# Altium PCB powerSupply.PcbDoc
Units mm, origin at the board's own origin, x right, y up, seen from the top; angles counter-clockwise.
Board outline 52 x 53 mm, 2 copper layers (Top Layer, Bottom Layer); 33 components, 25 nets, 89 pads, 40 vias.
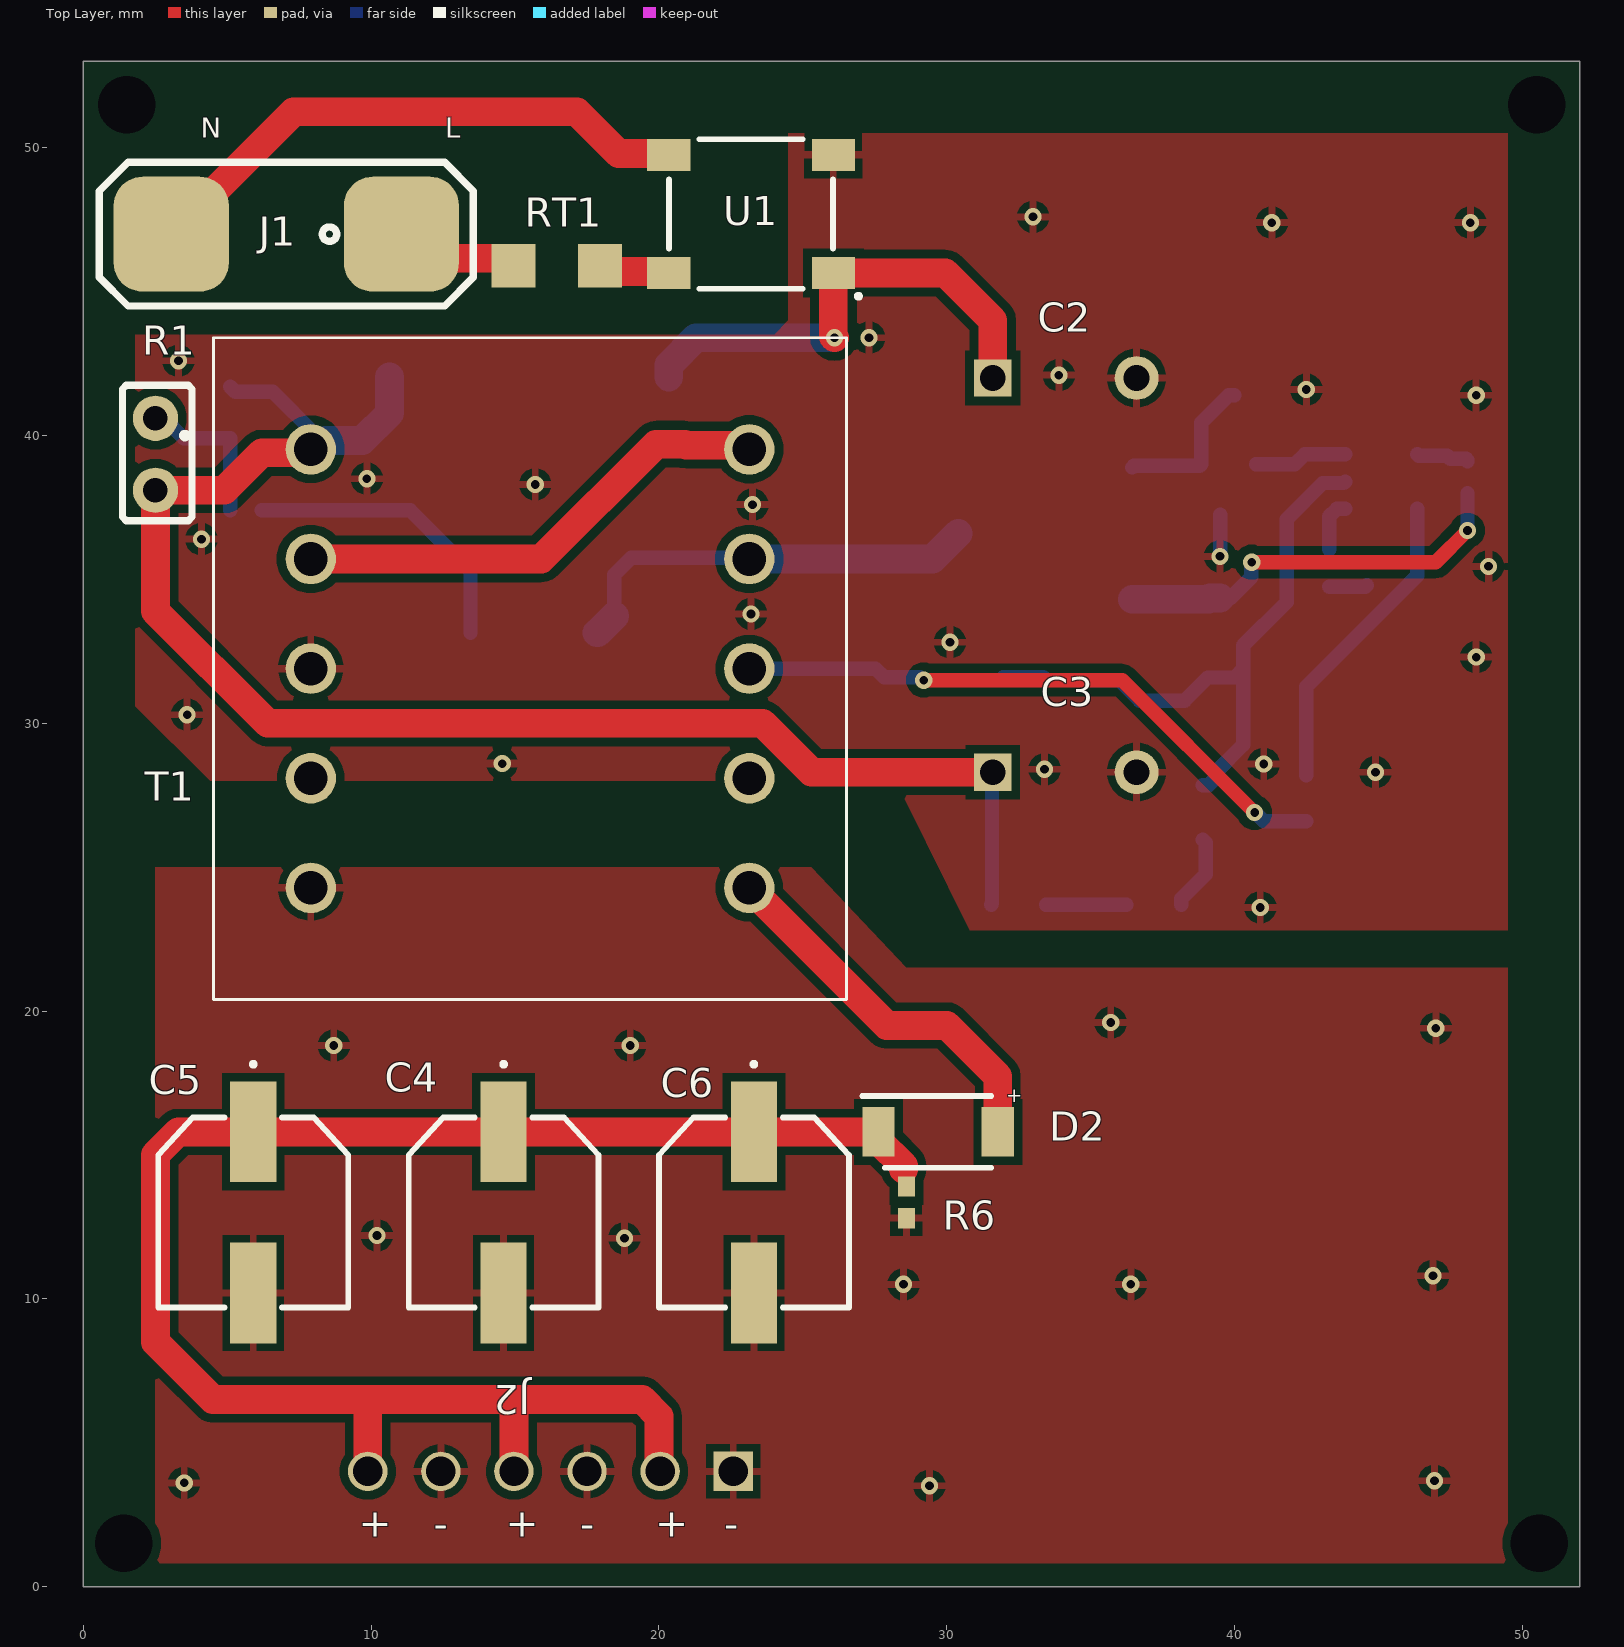
[diagram p0: Top Layer view]
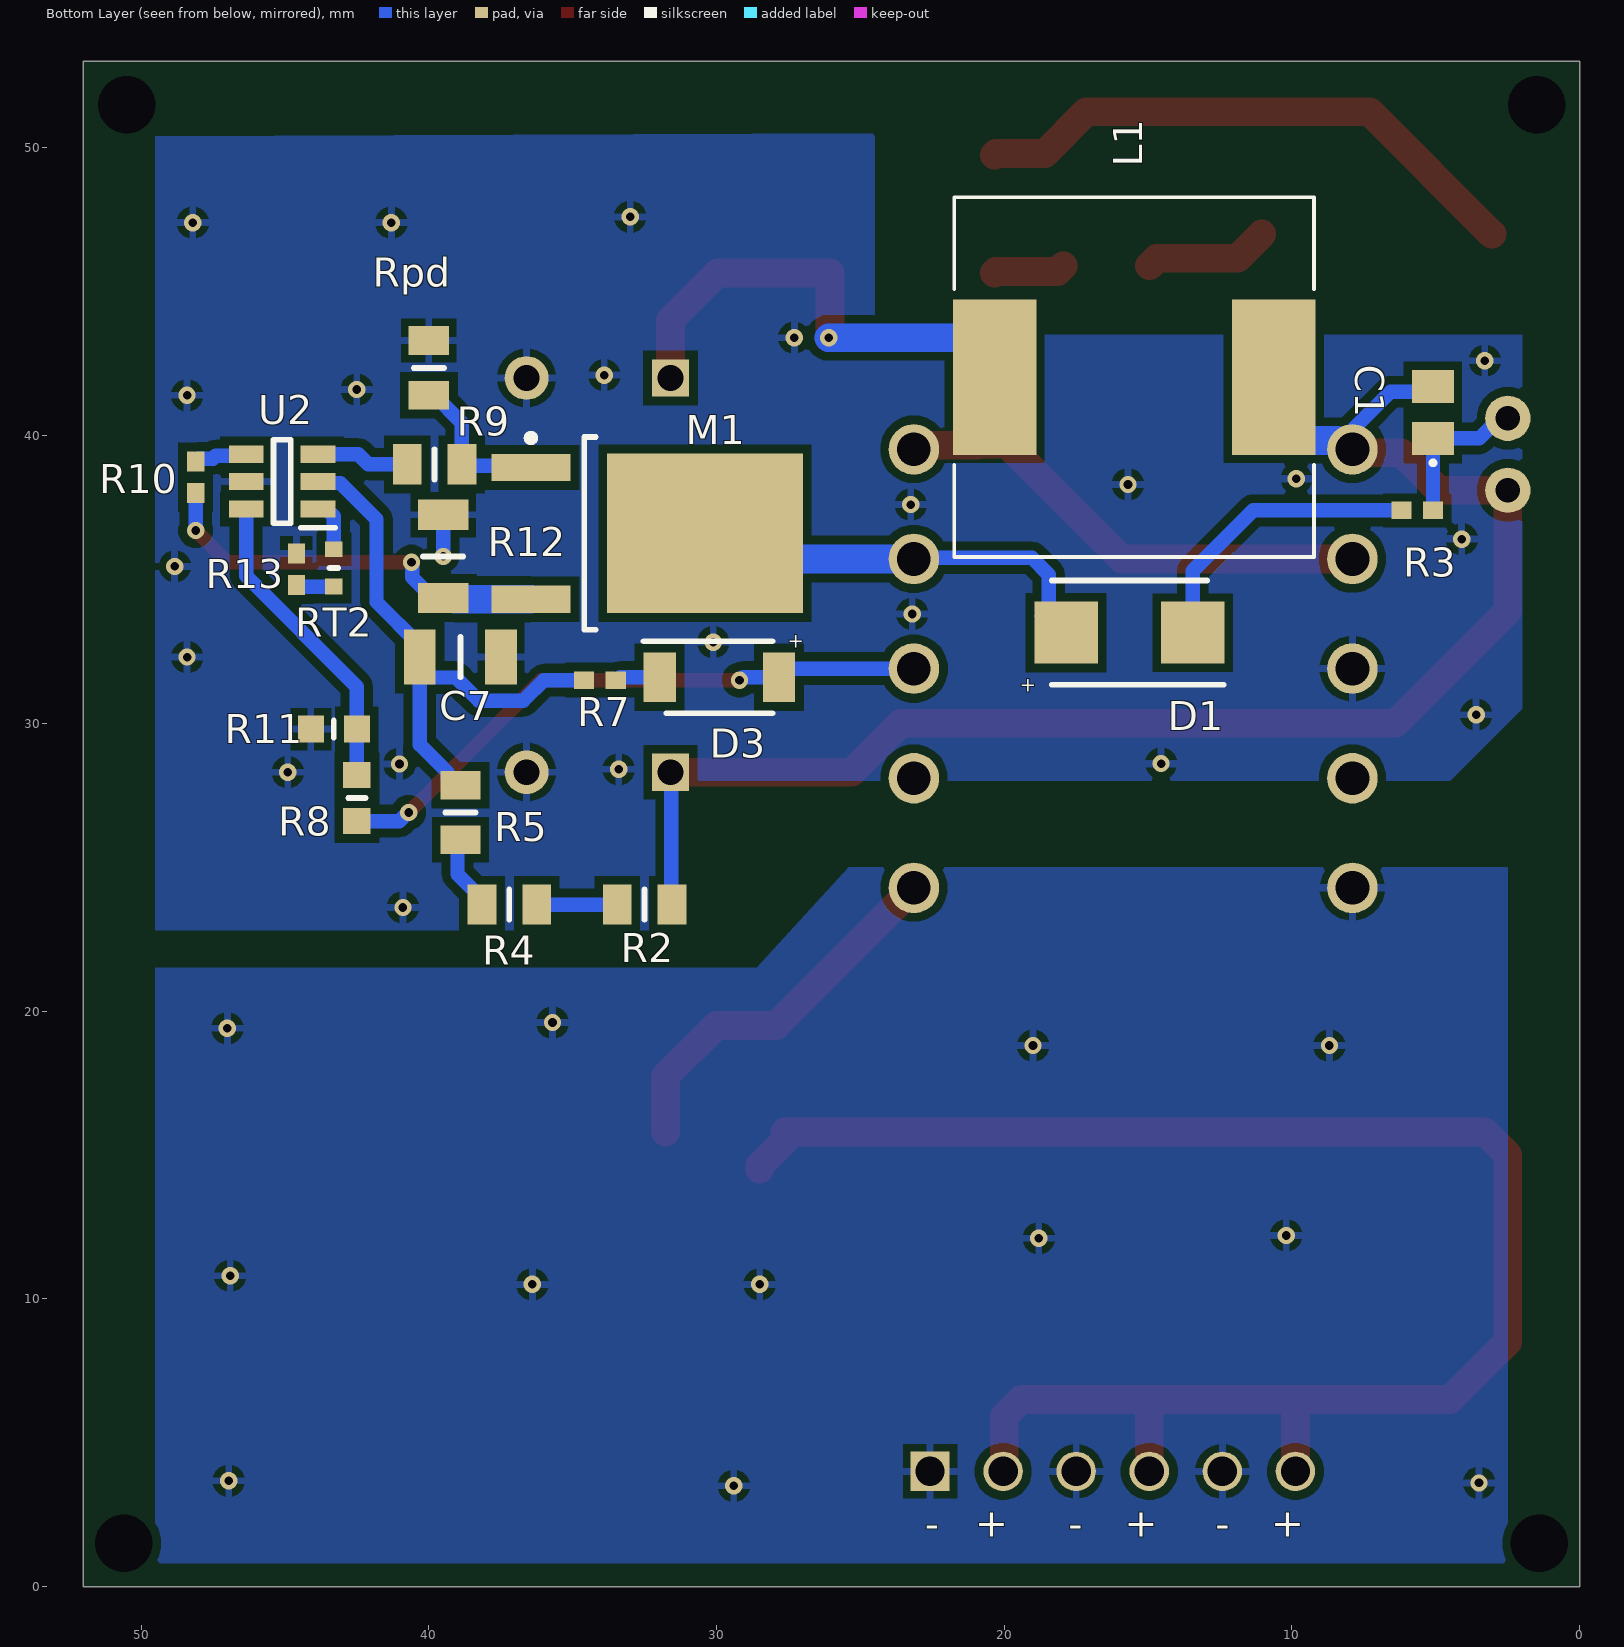
[diagram p1: Bottom Layer view, seen from below]
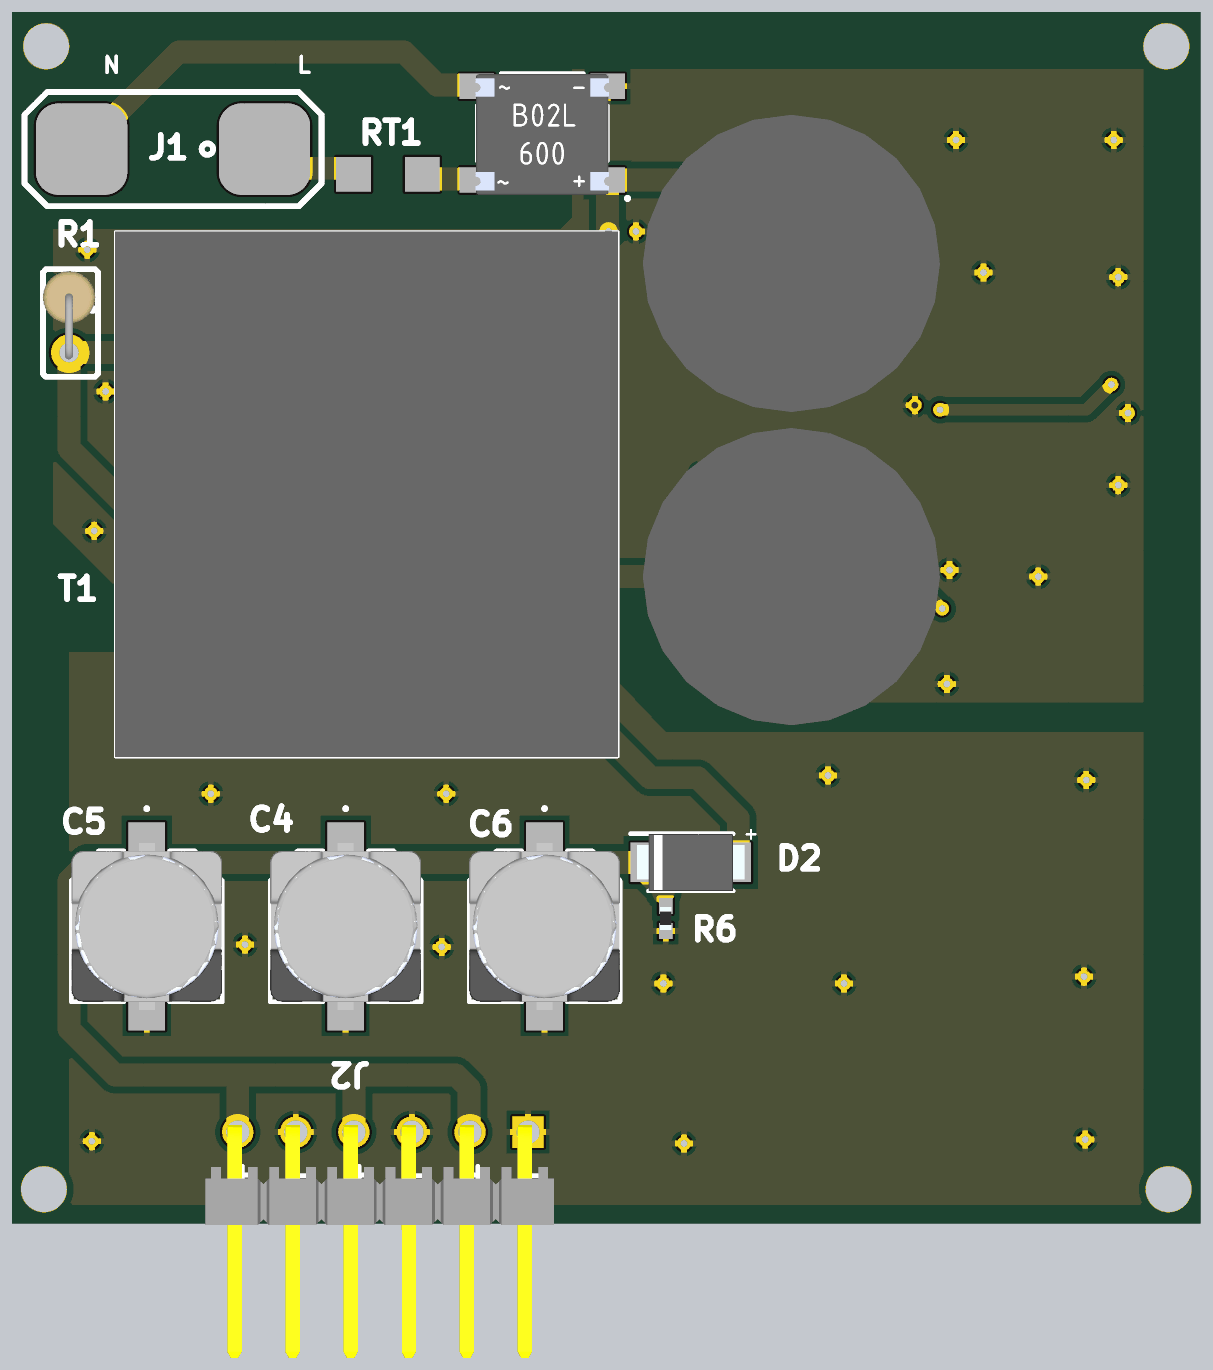
[diagram p2: 3D render of the assembled board from above, using the file's embedded part models]
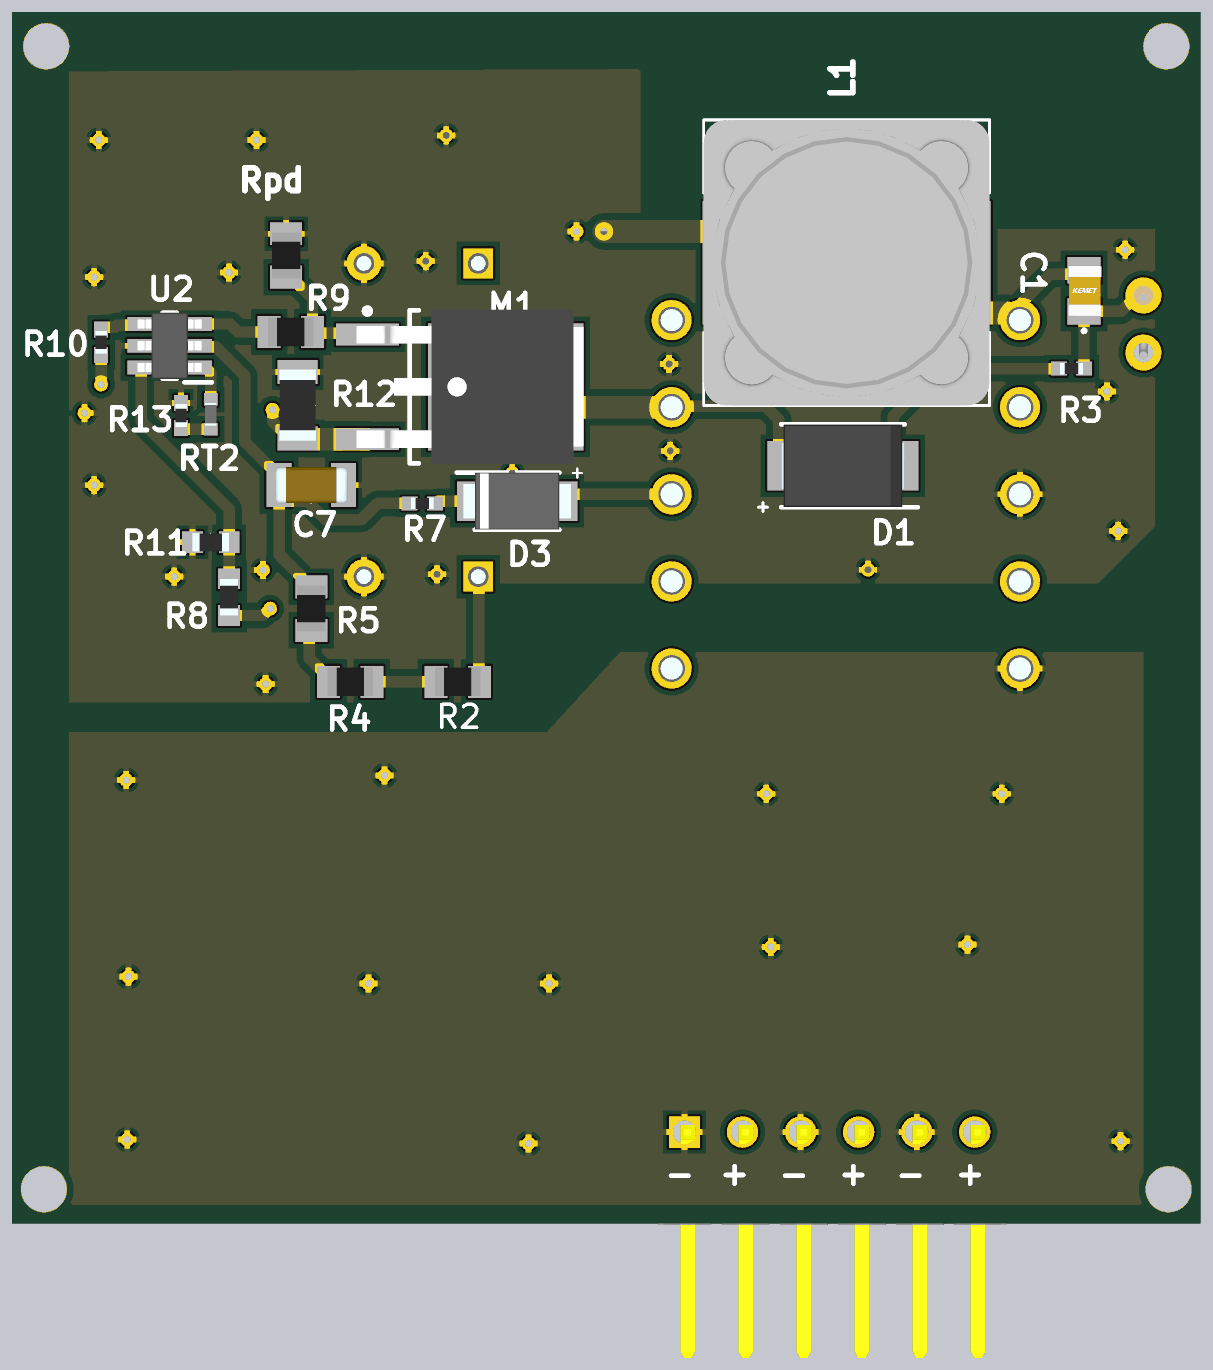
[diagram p3: 3D render of the assembled board from below, using the file's embedded part models]

## Layer stack, top to bottom
Top Solder: solder mask 0.0102, Solder Resist, Dk 3.8
Top Layer: signal copper 0.035
Dielectric 1: dielectric 0.32, FR-4, Dk 4.6
Bottom Layer: signal copper 0.035
Bottom Solder: solder mask 0.0102, Solder Resist, Dk 3.8

## Board outline
0,0 52,0 52,53 0,53

## Design rules (kind name [scope] priority, off if disabled: settings)
Clearance [All] p1: gap=0.3 ignorepadtopadclearanceinfootprint=FALSE
MinimumSolderMaskSliver [All] p1: minsoldermaskwidth=0.1
PolygonConnect [All] p1: connectstyle=Relief reliefconductorwidth=0.254 reliefentries=4 polygonreliefangle="90 Angle" airgapwidth=0.254
RoutingVias [All] p1: holewidth=0.3 width=0.6 viastyle="Through Hole" minholewidth=0.3 minwidth=0.6 maxholewidth=0.3 maxwidth=0.6
SilkToSolderMaskClearance [IsPad] p1: minsilkscreentomaskgap=0.1 clearancetoexposedcopper=TRUE
SolderMaskExpansion [All] p1: expansion=0.102 istentingtop=FALSE
Width [All] p1: maxlimit=1 minlimit=0.5 preferedwidth=0.5
28 further rules are at their usual default settings.

## Components (designator, comment, footprint, x,y, rotation, side; value= is the part's Value field where it differs from the comment)
C1 "0805C" 0805C 5.1,40.8 r90 bottom
C2 "10uF" 10uF 31.6,42 r0 top
C3 "10uF" 10uF 31.6,28.3 r0 top
C4 "16SVPG270MX" Cout 14.6,13 r180 top
C5 "16SVPG270MX" Cout 5.9,13 r180 top
C6 "16SVPG270MX" Cout 23.3,13 r180 top
C7 "1uF" 1206C 38.9,32.3 r0 bottom
D1 "UFS180Je3_TR13" UFS180Je3_TR13 15.65,33.15 r0 bottom
D2 "RB058LAM100TR" Shottky_Diode 29.7,15.8 r0 top
D3 "RB058LAM100TR" Shottky_Diode 29.9,31.6 r180 bottom
J1 "AC(IN)" AC(IN) 11.05,47 r180 top
J2 "12V" 1x6P 22.58,4 r0 top
L1 "Inductor" INDP125125X600N 15.486,42.03 r180 bottom
M1 "MOSFET" MOSFET 32.4,36.6 r180 bottom
R1 "3W-Resistor" 3W-Resistor 2.5,40.6 r270 top
R2 "4k99R" 0805R 32.5,23.7 r180 bottom
R3 "R" 0402R 6.2,37.4 r180 bottom
R4 "4k99R" 0805R 37.2,23.7 r180 bottom
R5 "4k99R" 0805R 38.9,26.9 r270 bottom
R6 "5k36R" 0402R 28.6,12.8 r90 top
R7 "22.1R" 0402R 34.6,31.5 r180 bottom
R8 "52k3R" 0603R 42.5,27.4 r270 bottom
R9 "10R" 0805R 39.8,39 r180 bottom
R10 "1k4R" 0402R 48.1,38 r90 bottom
R11 "19k6R" 0603R 43.3,29.8 r180 bottom
R12 "1.05R" 1206R 39.5,35.8 r270 bottom
R13 "6k19R" 0402R 44.6,35.9 r270 bottom
Rpd "10kR" 0805R 40,42.35 r270 bottom
RT1 "Cl-60" CL-60 14.95,45.9 r0 top
RT2 "NTCG104BF683JT1X" NTC 43.3,35.4 r270 bottom
T1 "750312495" 750312495 7.9,39.52 r0 top
U1 "CD-MBL206SL" CD-MBL210S_1 23.2,47.7 r270 top
U2 "UCC28701DBVT" SOT95P280X145-6N 45.1,38.4 r0 bottom

## Footprints (in the part's own frame and the unit in brackets; to place one, negate y for a bottom-side part, rotate by r counter-clockwise, add the part's x,y. Pads: shape width x height; smd on the part's side, far side on the other; paste and mask are expansions set on the pad)
1x6P [mm]
  rect 1.37x1.37 hole 1.02: 1(0,0)
  round 1.37 hole 1.02: 2(-2.54,0) 3(-5.08,0) 4(-7.62,0) 5(-10.16,0) 6(-12.7,0)
  body extent -14.11,-9.91 1.13,0.32, height 3.03
3W-Resistor [mm]
  round 1.575 hole 0.85: 1(0,0) 2(2.5,0)
  silkscreen extent -1.14,-1.14 3.56,1.27, body extent -1.07,-1.15 2.79,1.15, height 8.18
10uF [mm]
  rect 1.3x1.3 hole 0.9: 1(0,0)
  round 1.524 hole 0.9: 2(5,0)
  body extent -4,-6.5 9,6.5, height 27
0402R [mm]
  rect 0.7x0.6 smd: 1(0,0) 2(1.1,0)
  body extent 0.05,-0.25 1.05,0.25, height 0.35
0603R [mm]
  rect 0.9x0.95 smd: 1(-0.8,0) 2(0.8,0)
  silkscreen extent 0,-0.3 0,0.3, body extent -0.8,-0.4 0.8,0.4, height 0.55
0805C [mm]
  rect 1.15x1.45 smd: 1(-0.9,0) 2(0.9,0)
  silkscreen extent -1.8,-0.05 -1.7,0.05, body extent -1.1,-0.76 1.1,0.69, height 0.89
0805R [mm]
  rect 1x1.4 smd: 1(-0.95,0) 2(0.95,0)
  silkscreen extent 0,-0.53 0,0.53, body extent -1,-0.63 1,0.63, height 0.5
1206C [mm]
  rect 1.1x1.92 smd: 1(-1.41,0) 2(1.41,0)
  silkscreen extent 0,-0.7 0,0.7, body extent -1.6,-0.8 1.6,0.8, height 2.29
1206R [mm]
  rect 1.05x1.75 smd: 1(-1.45,0) 2(1.45,0)
  silkscreen extent 0,-0.7 0,0.7, body extent -1.55,-0.8 1.55,0.8, height 0.75
750312495 [mm]
  round 1.755 hole 1.17: 1(0,0) 2(0,-3.81) 3(0,-7.62) 4(0,-11.43) 5(0,-15.24) 6(15.24,-15.24) 7(15.24,-11.43) 8(15.24,-7.62) 9(15.24,-3.81) 10(15.24,0)
  silkscreen extent -4.48,-19.12 18.62,3.88, body extent -3.38,-19.12 18.62,3.88, height 17.63
AC(IN) [mm]
  rrect50% 4x4 smd: 1(0,0) 2(8,0)
  silkscreen extent -2.5,-2.5 10.5,2.5
CD-MBL210S_1 [mm]
  rect 1.1x1.5 smd: 1(2.05,2.86) 2(2.05,-2.86) 3(-2.05,-2.86) 4(-2.05,2.86)
  silkscreen extent -2.6,-2.85 2.91,3.78, body extent -2.59,-2.92 2.71,2.92, height 1.23
CL-60 [mil]
  rect 60x60 smd: 1(0,0) 2(118.11,0)
Cout [mm]
  rect 1.6x3.5 smd: 1(0,-2.8) 2(0,2.8)
  silkscreen extent -3.3,-5.2 3.3,3.3, body extent -3.3,-3.65 3.3,3.65, height 7.91
INDP125125X600N [mm]
  rect 2.9x5.4 smd: 1(-4.85,0) 2(4.85,0)
  silkscreen extent -6.25,-6.25 6.25,6.25, body extent -6.25,-6.25 6.25,6.25, height 6.01
MOSFET [mm] "D-PAK, 3-Pads, Body 6.21x6.73mm (max), IPC High Density"
  rect 2.75x0.95 smd: 1(-4.05,2.29) 3(-4.05,-2.29)
  rect 6.8x5.55 smd: 4(2,0)
  silkscreen extent -4.18,-3.35 -1.8,3.44, body extent -4.52,-3.37 5.42,3.37, height 2.56
NTC [mm]
  rect 0.55x0.6 smd: 1(-0.65,0) 2(0.65,0)
  silkscreen extent 0,-0.15 0,0.15, body extent -0.5,-0.25 0.5,0.25, height 0.55
Shottky_Diode [mm]
  rect 1.12x1.72 smd: 1(-2.075,0) 2(2.075,0)
  silkscreen extent -2.64,-1.25 1.85,1.25, body extent -2.35,-1.25 2.35,1.25, height 1.05
SOT95P280X145-6N [mm]
  rect 1.2x0.6 smd: 1(-1.25,0.95) 2(-1.25,0) 3(-1.25,-0.95) 4(1.25,-0.95) 5(1.25,0) 6(1.25,0.95)
  silkscreen extent -1.85,-1.45 0.3,1.6, body extent -1.4,-1.45 1.4,1.45, height 1.2
UFS180Je3_TR13 [mm]
  rect 2.2x2.15 smd: 1(-2.2,0) 2(2.2,0)
  silkscreen extent -3.27,-1.81 2.7,1.81, body extent -2.7,-1.81 2.7,1.81, height 3.3

## Part data
C2 C3: library part 10uF(Cin), "Alum. Electrolytic Cap 10µF 400V 10mm Radial WCAP-AT1H; Lifetime 10000h +105°C", Case/Package=Radial, Manufacturer="Wurth Electronics", Manufacturer Part Number=860241375002, Max Operating Temperature=105°C, Min Operating Temperature=-25°C, Package Quantity=500, Ripple Current=274mA, Tolerance=20%, Voltage Rating=400V, Capacitance=10uF, Category="Aluminum Electrolytic Capacitors", ComponentLink1Description=http://www.farnell.com/datasheets/1958429.pdf?src-supplier=Farnell, ComponentLink1URL=http://www.farnell.com/datasheets/1958429.pdf?src-supplier=Farnell, ComponentLink2Description=http://katalog.we-online.de/pbs/datasheet/860241375002.pdf?src-supplier=Digi-Key, ComponentLink2URL=http://katalog.we-online.de/pbs/datasheet/860241375002.pdf?src-supplier=Digi-Key, ComponentLink3Description=http://www.farnell.com/datasheets/1958429.pdf?src-supplier=Element14, ComponentLink3URL=http://www.farnell.com/datasheets/1958429.pdf?src-supplier=Element14, Diameter=10mm, Height=16mm, Height - Seated (Max)=0.688inch, Lead Pitch=0.197inch, Life (Hours)=10000Hour, Mount="Through Hole", Packaging="Tape and Reel", Polarity=Polar, Pricing 1="1=0.88000, 10=0.87700, 50=0.74800, 100=0.65100, 1000=0.57900, 10000=0.57900 (USD)", REACH SVHC=Unknown, RoHS=Yes, RoHS Compliant=Yes, Stock 1=2312, Supplier 1=Mouser, Voltage Rating (DC)=400V
C4 C5 C6: library part Cout, "Capacitor Polarised", Manufacturer_Name=Panasonic, Mouser Part Number=667-16SVPG270MX, Arrow Part Number=16SVPG270MX, Arrow Price/Stock=https://www.arrow.com/en/products/16svpg270mx/panasonic?region=nac, Datasheet Link=http://industrial.panasonic.com/cdbs/www-data/pdf/AAB8000/AAB8000C175.pdf, Height=8mm, Manufacturer_Part_Number=16SVPG270MX, Mouser Price/Stock=https://www.mouser.co.uk/ProductDetail/Panasonic/16SVPG270MX?qs=XFmntM7Yc9fZM%2FbqBr2Fvw%3D%3D
C7: library part 1206C, "Cap Ceramic 1uF 100V X7R 10% SMD 1206 125°C Embossed T/R", Case/Package=1206, Dielectric=X7R, Manufacturer="Kyocera AVX", Manufacturer Part Number=12061C105KAT4A, Tolerance=10%, Voltage Rating (DC)=100V, Capacitance=1uF, Category="Ceramic Capacitors", ComponentLink1Description=http://datasheets.avx.com/X7RDielectric.pdf?src-supplier=Digi-Key, ComponentLink1URL=http://datasheets.avx.com/X7RDielectric.pdf?src-supplier=Digi-Key, Pricing 1="1=0.49000, 10=0.23600, 50=0.23600, 100=0.20300, 1000=0.12800, 10000=0.10400 (USD)", RoHS=Yes, RoHS Compliant=Yes, Stock 1=79379, Supplier 1=Mouser
D1: "Diode", Arrow Part Number=UFS180JE3/TR13, Manufacturer_Name="Microsemi Corporation", Manufacturer_Part_Number=UFS180Je3/TR13, Mouser Part Number=494-UFS180JE3/TR13, Arrow Price/Stock=https://www.arrow.com/en/products/ufs180je3tr13/microsemi, Datasheet Link=https://media.digikey.com/pdf/Data%20Sheets/Microsemi%20PDFs/UFS160J-UFS180J.pdf, Height=3.3mm, Mouser Price/Stock=https://www.mouser.co.uk/ProductDetail/Microchip-Microsemi/UFS180Je3-TR13?qs=pU29NIZ4ZwBQwIY5BrOkmA%3D%3D
D2 D3: library part Shottky_Diode, "Schottky Diode", Manufacturer_Name="ROHM Semiconductor", Mouser Part Number=755-RB058LAM100TR, Datasheet Link=https://fscdn.rohm.com/en/products/databook/datasheet/discrete/diode/schottky_barrier/rb058lam100tr-e.pdf, Height=1.05mm, Manufacturer_Part_Number=RB058LAM100TR, Mouser Price/Stock=https://www.mouser.co.uk/ProductDetail/ROHM-Semiconductor/RB058LAM100TR?qs=HXFqYaX1Q2xzCgpEm4IcAg%3D%3D
J2: library part Out(12V)
L1: library part 470uH(L1), "Inductor Power Shielded Wirewound 470uH 10% 1KHz 18Q-Factor Ferrite 0.18A 3.3Ohm DCR T/R", Case/Package=Nonstandard, Current=2.2A, Current Rating=180mA, DC Resistance (DCR)=3.3R, Inductance=470uH, Manufacturer=Bourns, Manufacturer Part Number=SRR0604-471KL, Max Operating Temperature=125°C, Min Operating Temperature=-40°C, Package Quantity=1000, Resistor Type=Wirewound, Saturation Current=220mA, Self Resonant Frequency=6.5MHz, Test Frequency=1kHz, Tolerance=10%, Category="Fixed Inductors", ComponentLink1Description=https://datasheet.ciiva.com/29348/447222-da-01-en-induktivitaet-srr0604-471kl-470uh-0-22a-29348188.pdf?src-supplier=Conrad, ComponentLink1URL=https://datasheet.ciiva.com/29348/447222-da-01-en-induktivitaet-srr0604-471kl-470uh-0-22a-29348188.pdf?src-supplier=Conrad, ComponentLink2Description=https://datasheet.ciiva.com/6691/srr0604-6691703.pdf?src-supplier=Digi-Key, ComponentLink2URL=https://datasheet.ciiva.com/6691/srr0604-6691703.pdf?src-supplier=Digi-Key, ComponentLink3Description=https://datasheet.ciiva.com/6691/srr0604-6691705.pdf?src-supplier=Digi-Key, ComponentLink3URL=https://datasheet.ciiva.com/6691/srr0604-6691705.pdf?src-supplier=Digi-Key, ComponentLink4Description=https://datasheet.ciiva.com/6691/srr0604-6691708.pdf?src-supplier=Digi-Key, ComponentLink4URL=https://datasheet.ciiva.com/6691/srr0604-6691708.pdf?src-supplier=Digi-Key, ComponentLink5Description=https://datasheet.ciiva.com/8517/srr0604-8517198.pdf?src-supplier=Avnet, ComponentLink5URL=https://datasheet.ciiva.com/8517/srr0604-8517198.pdf?src-supplier=Avnet, ComponentLink6Description=https://datasheet.ciiva.com/31843/srr0604-31843470.pdf?src-supplier=Onlinecomponents.com, ComponentLink6URL=https://datasheet.ciiva.com/31843/srr0604-31843470.pdf?src-supplier=Onlinecomponents.com, Core Material=Ferrite, DC Current=180mA, Depth=6.7mm, Height=4.8mm, Height - Seated (Max)=0.189inch, Length=6.5mm, Max DC Current=180mA, Military Standard=Not, Mount="Surface Mount", Packaging="Tape and Reel", Pricing 1="1=0.93000, 10=0.67800, 50=0.67800, 100=0.62800, 1000=0.41200, 10000=0.38700 (USD)", Q Factor=18, Radiation Hardening=No, RoHS=Yes, Shielding=Shielded, Stock 1=1611, Supplier 1=Mouser, Termination=SMD/SMT, Width=6.5mm
M1: "Single N-Channel 800 V 900 mOhm 15 nC CoolMOS Power Mosfet - DPAK", Capacitance=15pF, Case/Package=TO-252-3, Continuous Drain Current (ID)=6A, Drain to Source Voltage (Vdss)=800V, Frequency=16MHz, Frequency Stability=0.15%, Frequency Tolerance=0.5%, Input Capacitance=350pF, Manufacturer=Infineon, Manufacturer Part Number=IPD80R900P7ATMA1, Max Operating Temperature=150°C, Max Power Dissipation=45W, Min Operating Temperature=-55°C, Resistor Type=Ceramic, Category=MOSFETs, ComponentLink1Description=https://www.infineon.com/dgdl/Infineon-IPD80R900P7-DS-v02_00-EN.pdf?fileId=5546d4625b3ca4ec015b4287da753ee9&src-supplier=Digi-Key, ComponentLink1URL=https://www.infineon.com/dgdl/Infineon-IPD80R900P7-DS-v02_00-EN.pdf?fileId=5546d4625b3ca4ec015b4287da753ee9&src-supplier=Digi-Key, Halogen Free="Halogen Free", Impedance=40R, Lead Free="Contains Lead", Max Dual Supply Voltage=800V, Mount="Surface Mount", Packaging="Cut Tape", Pricing 1="1=1.85000, 10=1.67000, 50=1.67000, 100=1.30000, 1000=0.94000, 10000=0.93900 (USD)", Rds On Max=900mR, RoHS=Yes, RoHS Compliant=Yes, Stock 1=130, Supplier 1=Mouser
R1: "Resistor", Arrow Part Number=PR03000206202JAC00, Manufacturer_Name=Vishay, Mouser Part Number=594-5093NW62K00J, Arrow Price/Stock=https://www.arrow.com/en/products/pr03000206202jac00/vishay, Datasheet Link=https://www.vishay.com/docs/28729/pr010203.pdf, Manufacturer_Part_Number=PR03000206202JAC00, Mouser Price/Stock=https://www.mouser.co.uk/ProductDetail/Vishay-BC-Components/PR03000206202JAC00?qs=LCMWAU1DZcxovZq7UzVsNA%3D%3D
R2 R4 R5 R9 Rpd: library part 0805R
R3 R6 R7 R10 R13: library part 0402R
R8: library part 0603R
R11: library part 0603R, LCSC Part No=C321774
R12: library part 1206R
RT1: "CL Series 10 Ohm ± 25 % 5 A Radial Uninsulated Leads Thermistor Disc", Manufacturer=Amphenol, Manufacturer Part Number=CL-60, Category=Uncategorized, ComponentLink1Description=https://datasheet.ciiva.com/29855/aas-920-325d-thermometrics-ntc-inrush-031814-web-29855691.pdf?src-supplier=Digi-Key, ComponentLink1URL=https://datasheet.ciiva.com/29855/aas-920-325d-thermometrics-ntc-inrush-031814-web-29855691.pdf?src-supplier=Digi-Key, ComponentLink2Description=https://datasheet.ciiva.com/31455/629282-31455967.pdf?src-supplier=Element14, ComponentLink2URL=https://datasheet.ciiva.com/31455/629282-31455967.pdf?src-supplier=Element14, ComponentLink3Description=https://datasheet.ciiva.com/46652/70181314-46652413.pdf?src-supplier=Allied+Electronics, ComponentLink3URL=https://datasheet.ciiva.com/46652/70181314-46652413.pdf?src-supplier=Allied+Electronics, Pricing 1="1=2.16000, 10=1.95000, 50=1.95000, 100=1.33000, 1000=0.97800, 10000=0.85800 (USD)", RoHS=No, Stock 1=5231, Supplier 1=Mouser
RT2: library part NTC, "Thermistor", Manufacturer_Name=TDK, Mouser Part Number=810-NTCG104BF683JT, Datasheet Link=https://product.tdk.com/system/files/dam/doc/product/sensor/ntc/chip-ntc-thermistor/catalog/tpd_commercial_ntc-thermistor_ntcg_en.pdf, Height=0.55mm, Manufacturer_Part_Number=NTCG104BF683JT1X, Mouser Price/Stock=https://www.mouser.com/Search/Refine.aspx?Keyword=810-NTCG104BF683JT
T1: library part Transformer, "Transformer", Manufacturer_Name="Wurth Elektronik", Mouser Part Number=710-750312495, Datasheet Link=https://www.we-online.com/catalog/datasheet/750312495.pdf, Height=17.53mm, Manufacturer_Part_Number=750312495, Mouser Price/Stock=https://www.mouser.co.uk/ProductDetail/Wurth-Elektronik/750312495?qs=qSfuJ%252Bfl%2Fd7M%2FwhZasVw9g%3D%3D
U1: library part Bridge_Rectifier, "DIO BR VRRM 600V 2A MBLS / Tape & Reel - 13\" reel RoHS Compliant: Yes", Average Rectified Current=2A, Manufacturer=Bourns, Max Operating Temperature=175°C, Min Operating Temperature=-55°C, ComponentLink1Description=http://www.farnell.com/datasheets/2176055.pdf?src-supplier=Farnell, ComponentLink1URL=http://www.farnell.com/datasheets/2176055.pdf?src-supplier=Farnell, ComponentLink2Description=http://www.farnell.com/datasheets/2176055.pdf?src-supplier=Element14, ComponentLink2URL=http://www.farnell.com/datasheets/2176055.pdf?src-supplier=Element14, ComponentLink3Description=https://www.bourns.com/docs/Product-Datasheets/cd-mbl2xxsl.pdf?src-supplier=Digi-Key, ComponentLink3URL=https://www.bourns.com/docs/Product-Datasheets/cd-mbl2xxsl.pdf?src-supplier=Digi-Key, Manufacturer Part Number=CD-MBL206SL, Mount="Surface Mount", Packaging="Cut Tape", Pricing 1="1=0.45000, 10=0.39200, 50=0.39200, 100=0.29300, 1000=0.17800, 10000=0.13700 (USD)", RoHS=Yes, RoHS Compliant=Yes, Stock 1=14176, Supplier 1=Mouser
U2: library part Flyback_Controller, "Integrated Circuit", Manufacturer_Name="Texas Instruments", Mouser Part Number=595-UCC28701DBVT, Arrow Part Number=UCC28701DBVT, Arrow Price/Stock=https://www.arrow.com/en/products/ucc28701dbvt/texas-instruments, Datasheet Link=http://www.ti.com/lit/gpn/ucc28701, Height=1.45mm, Manufacturer_Part_Number=UCC28701DBVT, Mouser Price/Stock=https://www.mouser.co.uk/ProductDetail/Texas-Instruments/UCC28701DBVT?qs=rg6Iqu58vpU9cO7MIDHsMA%3D%3D

## Free pads (board coordinates)
  round 0 hole 2: 1(1.4,1.5) 2(50.6,1.5) 3(50.5,51.5) 4(1.5,51.5)

## Via types
v1: diameter 0.6, hole 0.3, Top Layer to Bottom Layer, 40 vias

## Nets (pads, with @x,y where several pads share a name; then routed paths per layer and width w, separated by ;. In a path a pad name is that pad's centre, name@x,y a point inside that pad or via, vN(x,y) a via of type N, cw(c..) or ccw(c..) an arc to the next point about the centre after c; other vN are vias at no path point)
+12: C4.1 C5.1 C6.1 D2.1 J2.2 J2.4 J2.6 R6.2 | length 59.2
  Top Layer w1: J2.6 9.88,6.48 9.9,6.5 ; J2.4 14.96,6.44 14.9,6.5 ; J2.2 20,4.04 20,5.914 19.414,6.5 14.9,6.5 ; 28.5,14.5 28.5,14.625 27.625,15.5 D2.1 C5.1 3.3,15.8 2.5,15 2.5,8.5 4.5,6.5 9.9,6.5 ; 9.9,6.5 14.9,6.5
AC_L: J1.1 RT1.1 | length 4.4
  Top Layer w1: J1.1 11.888,46.162 14.688,46.162 RT1.1
AC_L2: RT1.2 U1.2 | length 2.5
  Top Layer w1: RT1.2 18.15,45.7 20.29,45.7 U1.2
AC_N: J1.2 U1.3 | length 19.7
  Top Layer w1: J1.2 7.3,51.25 17.15,51.25 18.6,49.8 20.29,49.8 U1.3
AUX_D_OUT: D3.1 R7.2 | length 1.6
  Bottom Layer w0.5: D3.1 33.35,31.6 33.45,31.5 R7.2
AUX_V+: D3.2 R8.2 T1.8 | length 21.6
  Top Layer w0.5: v1(29.2,31.5) 36.1,31.5 v1(40.7,26.9)
  Bottom Layer w0.5: T1.8 27.525,31.9 D3.2 29.073,31.6 29.173,31.5 v1(29.2,31.5) ; v1(40.7,26.9) 40.727,26.9 41.027,26.6 R8.2
HV_DC+: C2.1 L1.1 U1.1 | length 17.1
  Top Layer w1: v1(26.1,43.4) 26.06,43.44 U1.1 29.95,45.65 31.6,44 C2.1
  Bottom Layer w1: L1.1 20.336,42.45 21.286,43.4 v1(26.1,43.4)
HV_GND: C2.2 C3.2 C7.1 R11.1 R12.1 R13.1 Rpd.1 T1.3 U1.4 U2.5 | length 1.4
  Bottom Layer w0.5: v1(39.5,35.8) R12.1
  other v1: 40.9,23.6 44.9,28.3 33.4,28.4 41.017,28.586 14.55,28.6 3.6,30.3 48.4,32.3 30.114,32.82 23.2,33.8 48.827,35.453 4.1,36.4 23.25,37.6 15.7,38.3 9.85,38.5 48.4,41.4 42.5,41.6 33.9,42.1 3.3,42.6 27.3,43.4 41.3,47.4 48.2,47.4 33,47.6
HV_V+: C1.2 C3.1 L1.2 R1.2 R2.2 T1.1 | length 54.3
  Top Layer w1: T1.1 7.78,39.4 6.2,39.4 4.9,38.1 R1.2 2.5,33.9 6.4,30 23.602,30 25.302,28.3 C3.1
  Bottom Layer w0.5: C1.2 5.275,41.525 6.575,41.525 T1.1@8.027,40.072 ; R2.2 31.575,23.725 31.575,28.275 C3.1
  Bottom Layer w1: T1.1 8.044,39.664 8.27,39.664 8.436,39.83 9.686,39.83 10.636,40.78 L1.2
LV_GND: C4.2 C5.2 C6.2 J2.1 J2.3 J2.5 R6.1 T1.5
  other v1: 29.4,3.5 3.5,3.6 46.953,3.673 28.5,10.5 36.4,10.5 46.9,10.8 18.8,12.1 10.2,12.2 8.7,18.8 19,18.8 47,19.4 35.7,19.6
MOS_CS: R10.2 U2.4 | length 1.9
  Bottom Layer w0.5: U2.4 46.4,39.3 47.4,39.3 47.5,39.2 48.05,39.2 48.1,39.15 R10.2
MOS_Drain: D1.2 M1.4 T1.9 | length 14.9
  Bottom Layer w0.5: D1.2@18.45,33.725 18.45,35.164 19.036,35.75 T1.9@23.1,35.75
  Bottom Layer w1: D1.2 17.875,33.15 D1.2@18.45,33.725 ; T1.9@23.1,35.75 T1.9 29.51,35.71 M1.4
MOS_DRV: R9.1 U2.3 | length 3.2
  Bottom Layer w0.5: R9.1 42.1,39 42.45,39.35 U2.3
MOS_Gate: M1.1 R9.2 Rpd.2 | length 5.4
  Bottom Layer w0.5: M1.1 36.505,38.945 38.795,38.945 R9.2 38.85,40.45 39.8,41.4 Rpd.2
MOS_Source: M1.3 R10.1 R12.2 | length 14.2
  Top Layer w0.5: v1(40.6,35.6) 47,35.6 v1(48.1,36.7)
  Bottom Layer w0.5: R12.2 39.85,34.35 40.581,35.081 40.581,35.581 v1(40.6,35.6) ; v1(48.1,36.7) R10.1
  Bottom Layer w1: M1.3 39.11,34.31 39.15,34.35 R12.2
NTC_IN: RT2.1 U2.1 | length 1.8
  Bottom Layer w0.5: RT2.1 43.3,37.2 43.55,37.45 U2.1
NTC_OUT: R13.2 RT2.2 | length 1.3
  Bottom Layer w0.5: RT2.2 44.55,34.75 R13.2
PRI_Short: T1.2 T1.10 | length 17
  Top Layer w1: T1.2 15.91,35.71 19.9,39.7 20.9,39.7 20.936,39.664 22.996,39.664 T1.10
RSTR1: R2.1 R4.2 | length 2.8
  Bottom Layer w0.5: R2.1 R4.2
RSTR2: R4.1 R5.2 | length 2.6
  Bottom Layer w0.5: R4.1 38.15,23.9 39,24.75 39,25.85 R5.2
SEC_V+: D2.2 T1.6 | length 13.3
  Top Layer w1: T1.6 27.92,19.5 30,19.5 31.775,17.725 D2.2
SNUB_CAP_OUT: C1.1 R1.1 R3.2 | length 5.4
  Bottom Layer w0.5: R1.1 2.791,40.6 3.491,39.9 C1.1 R3.2
SNUB_DIODE_OUT: D1.1 R3.1 | length 10.3
  Bottom Layer w0.5: R3.1 11.35,37.4 13.45,35.3 D1.1
VDD_IN: C7.2 R5.1 R7.1 U2.2 | length 19.6
  Bottom Layer w0.5: R7.1 36.002,31.5 36.712,30.79 38.268,30.79 39.068,31.59 40.01,31.59 C7.2@40.31,31.89 ; R5.1 39.1,27.85 39.35,28.1 39.35,28.3 40.31,29.26 C7.2@40.31,31.89 ; U2.2 43.8,38.35 43.072,38.35 41.816,37.094 41.816,34.216 40.31,32.71 C7.2 C7.2@40.31,31.89
VS_IN: R8.1 R11.2 U2.6 | length 10.8
  Bottom Layer w0.5: R8.1 R11.2 42.5,31.272 46.35,35.122 U2.6
pads on no net: T1.4 T1.7

## Polygon pours and split planes (outlines as drawn)
LV_GND on Top Layer "LV_GND_L01_P000" (solid, pour order 0): 2.5,25 25.3,25 28.6,21.5 49.5,21.5 49.5,0.8 2.5,0.8
HV_GND on Top Layer "HV_GND_L01_P003" (solid, pour order 3): 1.8,43.5 1.8,30.6 4.4,28 28.234,28 30.8,22.8 49.5,22.8 49.5,50.5 24.5,50.5 24.5,44 24,43.5
HV_GND on Bottom Layer "HV_GND_L02_P005" (solid, pour order 5): 49.5,50.4 49.5,22.8 30.8,22.8 30.8,27.8 30.6,28 4.5,28 2,30.5 2,43.5 24,43.5 24.5,44 24.5,50.5
LV_GND on Bottom Layer "LV_GND_L02_P001" (solid, pour order 1): 2.5,25 25.4,25 28.6,21.5 49.5,21.5 49.5,0.8 2.5,0.8

## Silkscreen, mask and mechanical layers (free items; w line width, h text height)
Top Overlay:
  text "N" at 4.067,50.35 h0.7
  text "L" at 12.567,50.35 h0.7
  text "+" at 9.567,1.733 h1
  text "+" at 14.667,1.733 h1
  text "+" at 19.867,1.733 h1
  text "-" at 12.167,1.7 h1
  text "-" at 17.267,1.7 h1
  text "-" at 22.267,1.7 h1
Bottom Overlay:
  text "+" at 9.567,1.733 h1
  text "+" at 14.667,1.733 h1
  text "+" at 19.867,1.733 h1
  text "-" at 12.167,1.7 h1
  text "-" at 17.267,1.7 h1
  text "-" at 22.267,1.7 h1

## Text inside footprints (layer, text, board x,y; h text height)
D1: Bottom Overlay "+" at 18.884,31.535 h0.5 r180
D2: Top Overlay "+" at 32.073,16.833 h0.5
D3: Bottom Overlay "+" at 27.527,32.633 h0.5